# Altium PCB OvenPi.PcbDoc
Units mil, origin at the board's own origin, x right, y up, seen from the top; angles counter-clockwise.
Board outline 1525 x 1500 mil, 2 copper layers (Top Layer, Bottom Layer); 12 components, 15 nets, 60 pads, 0 vias.
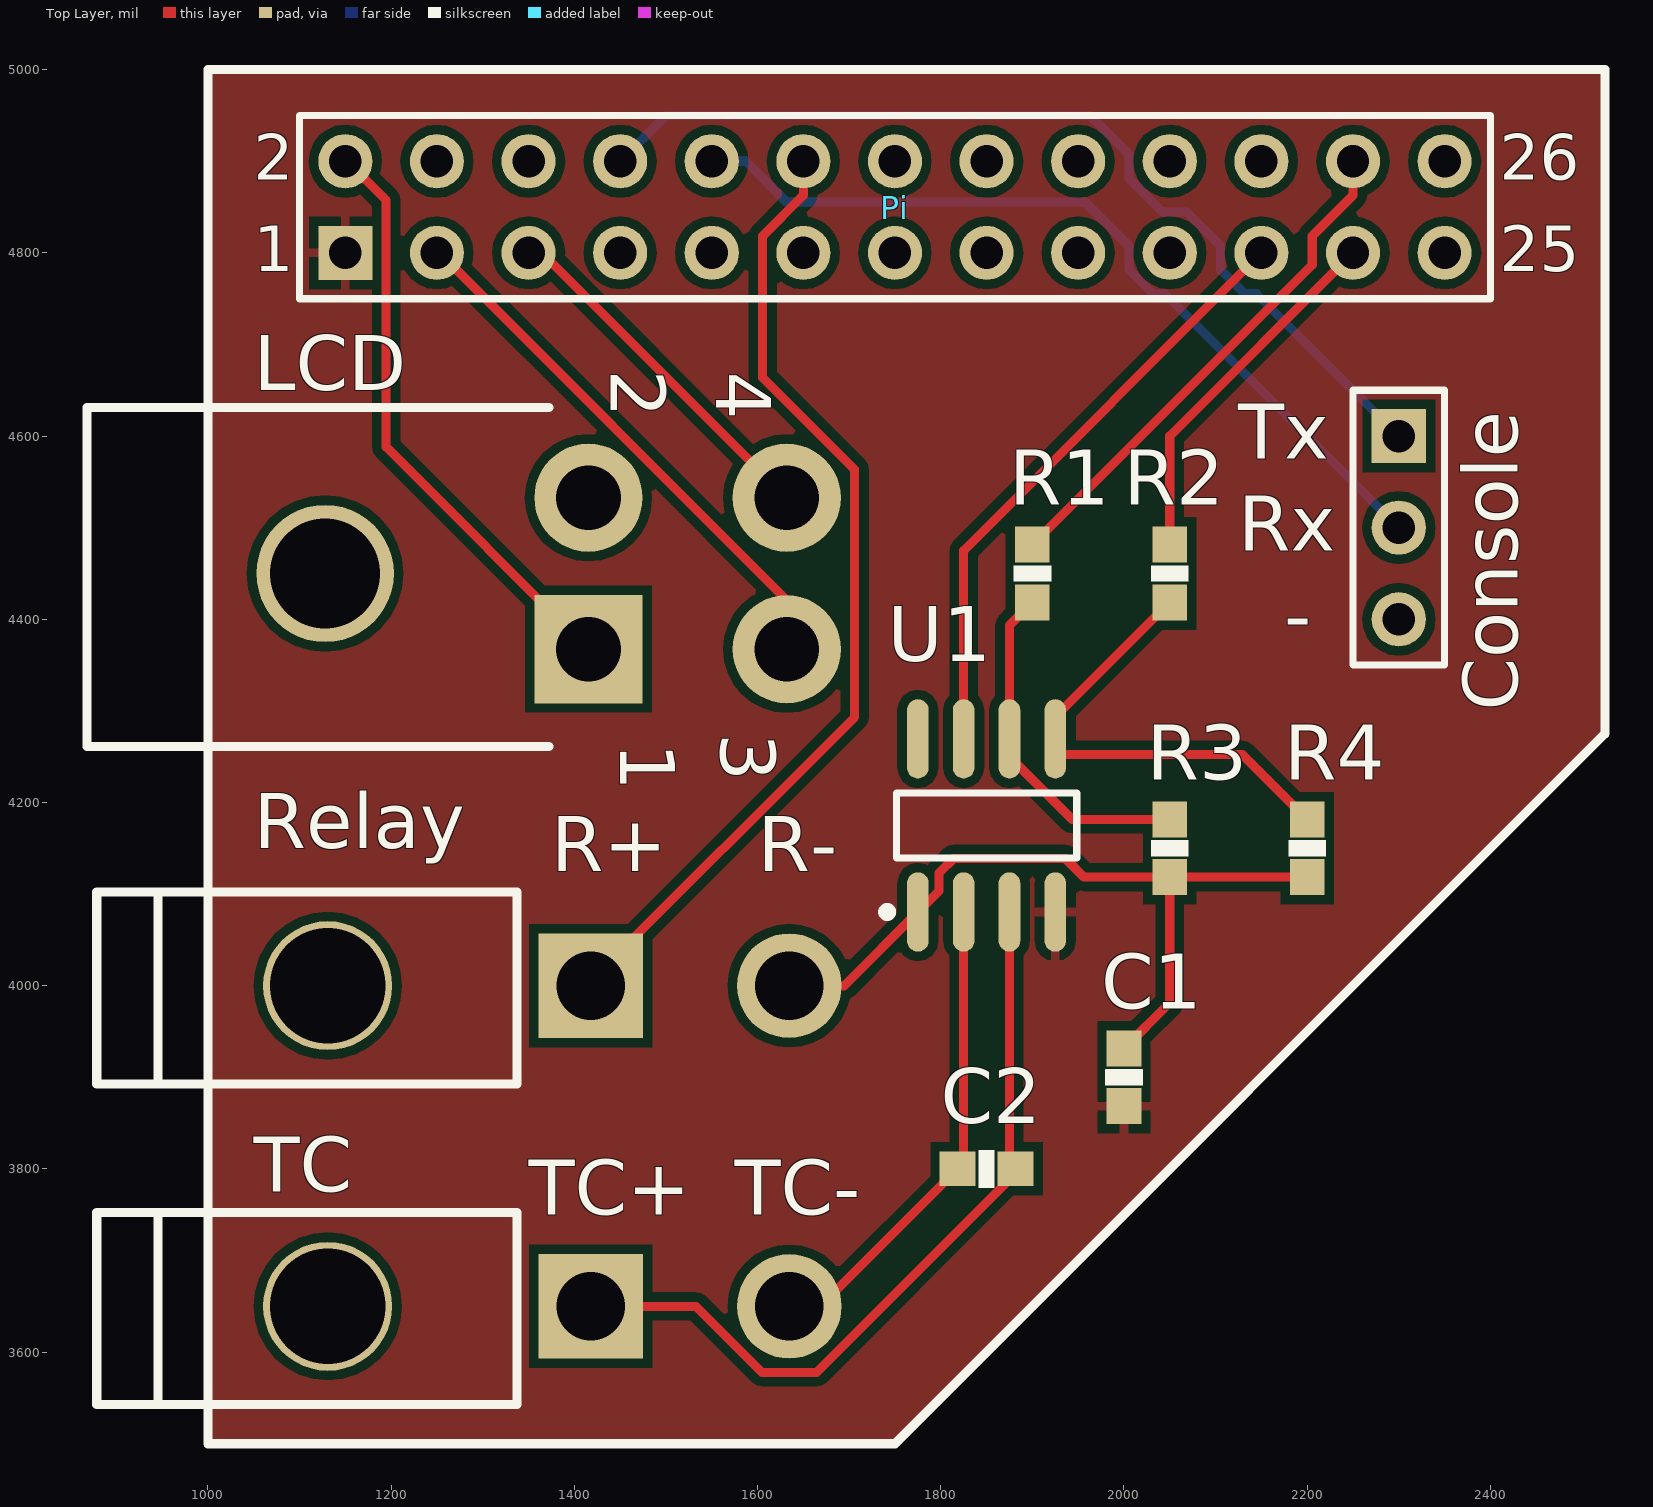
[diagram p0: Top Layer view]
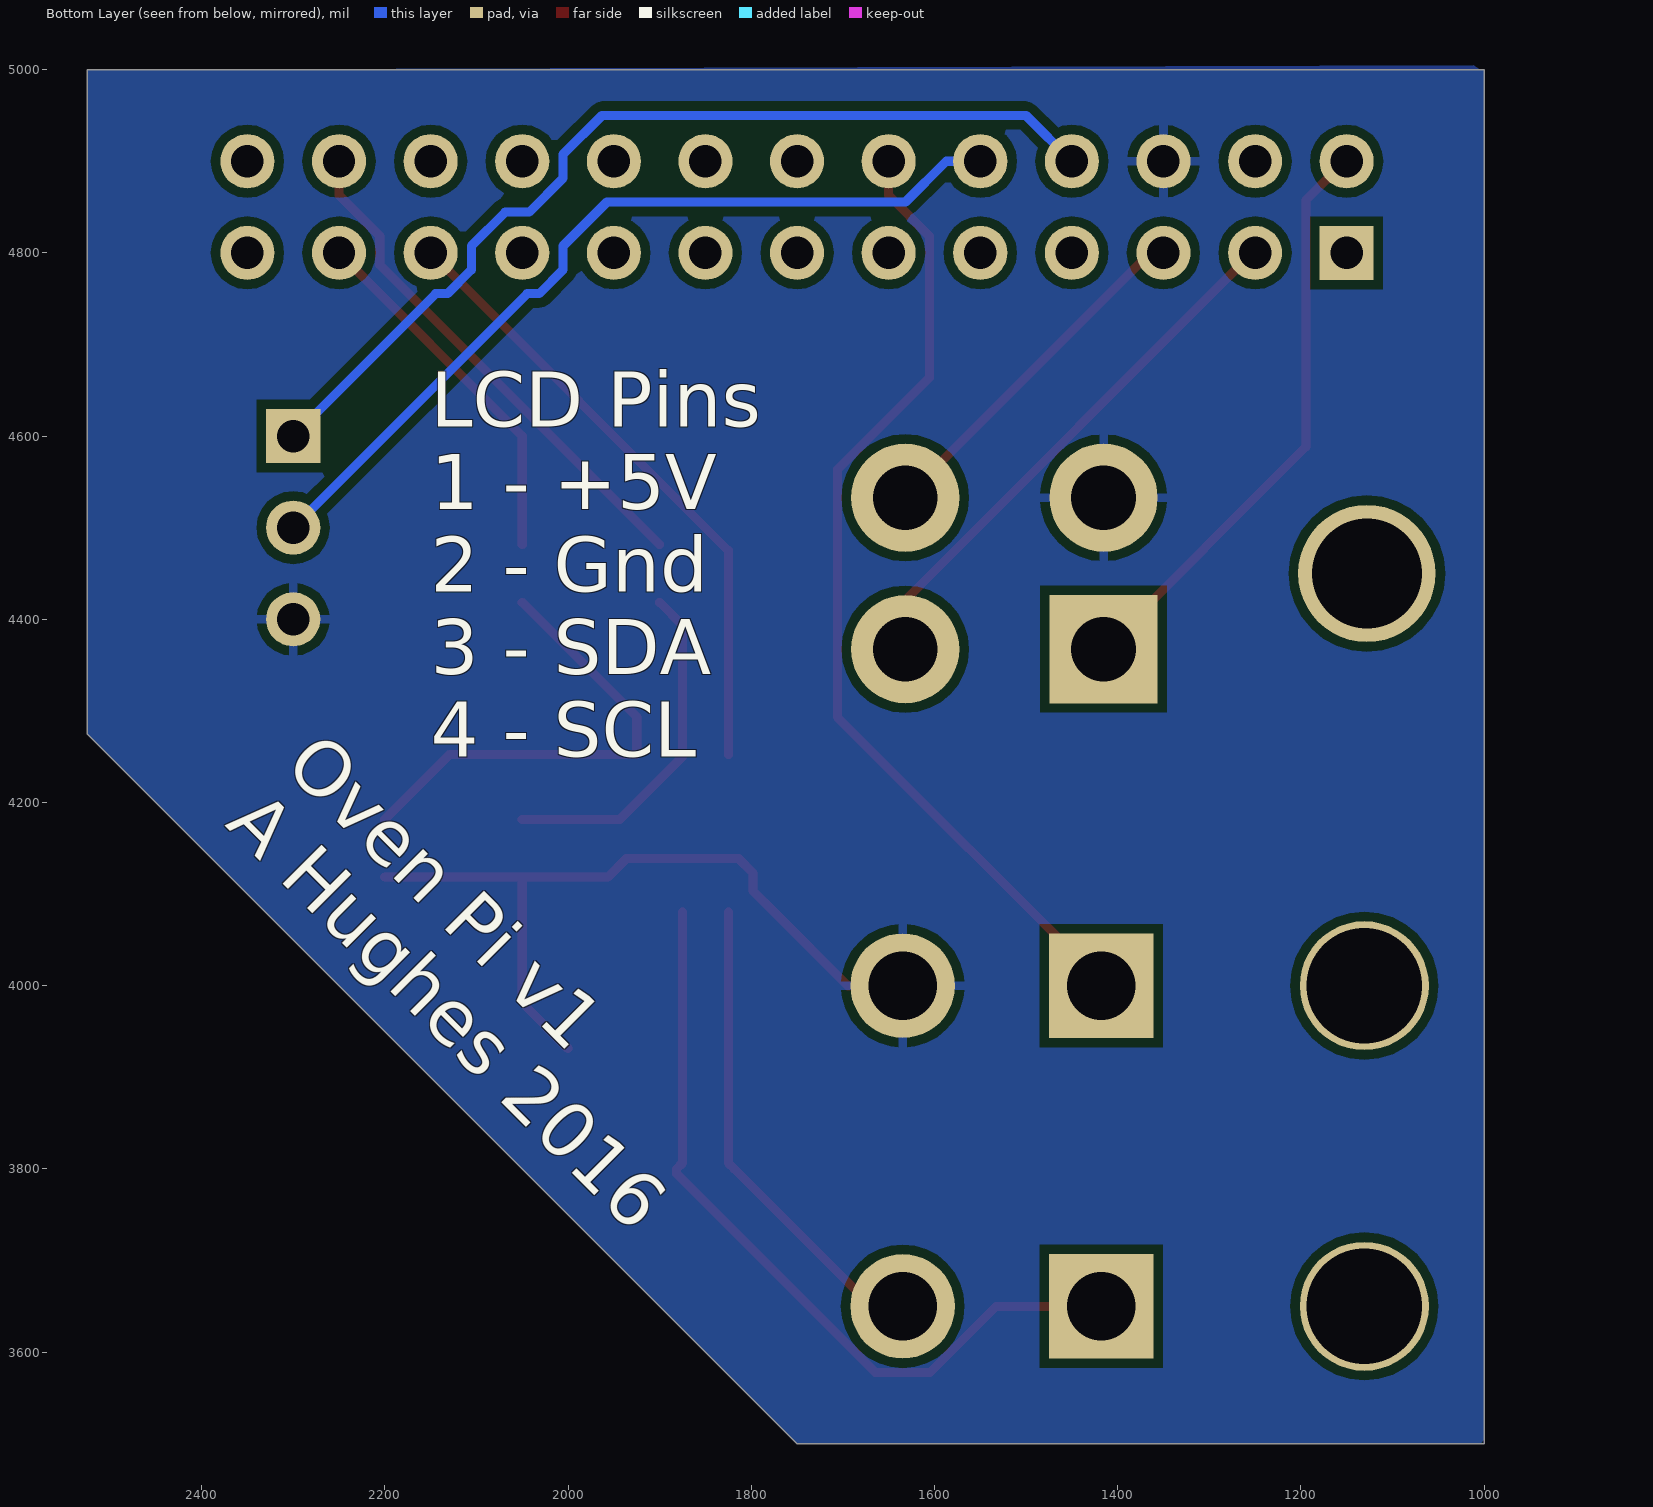
[diagram p1: Bottom Layer view, seen from below]
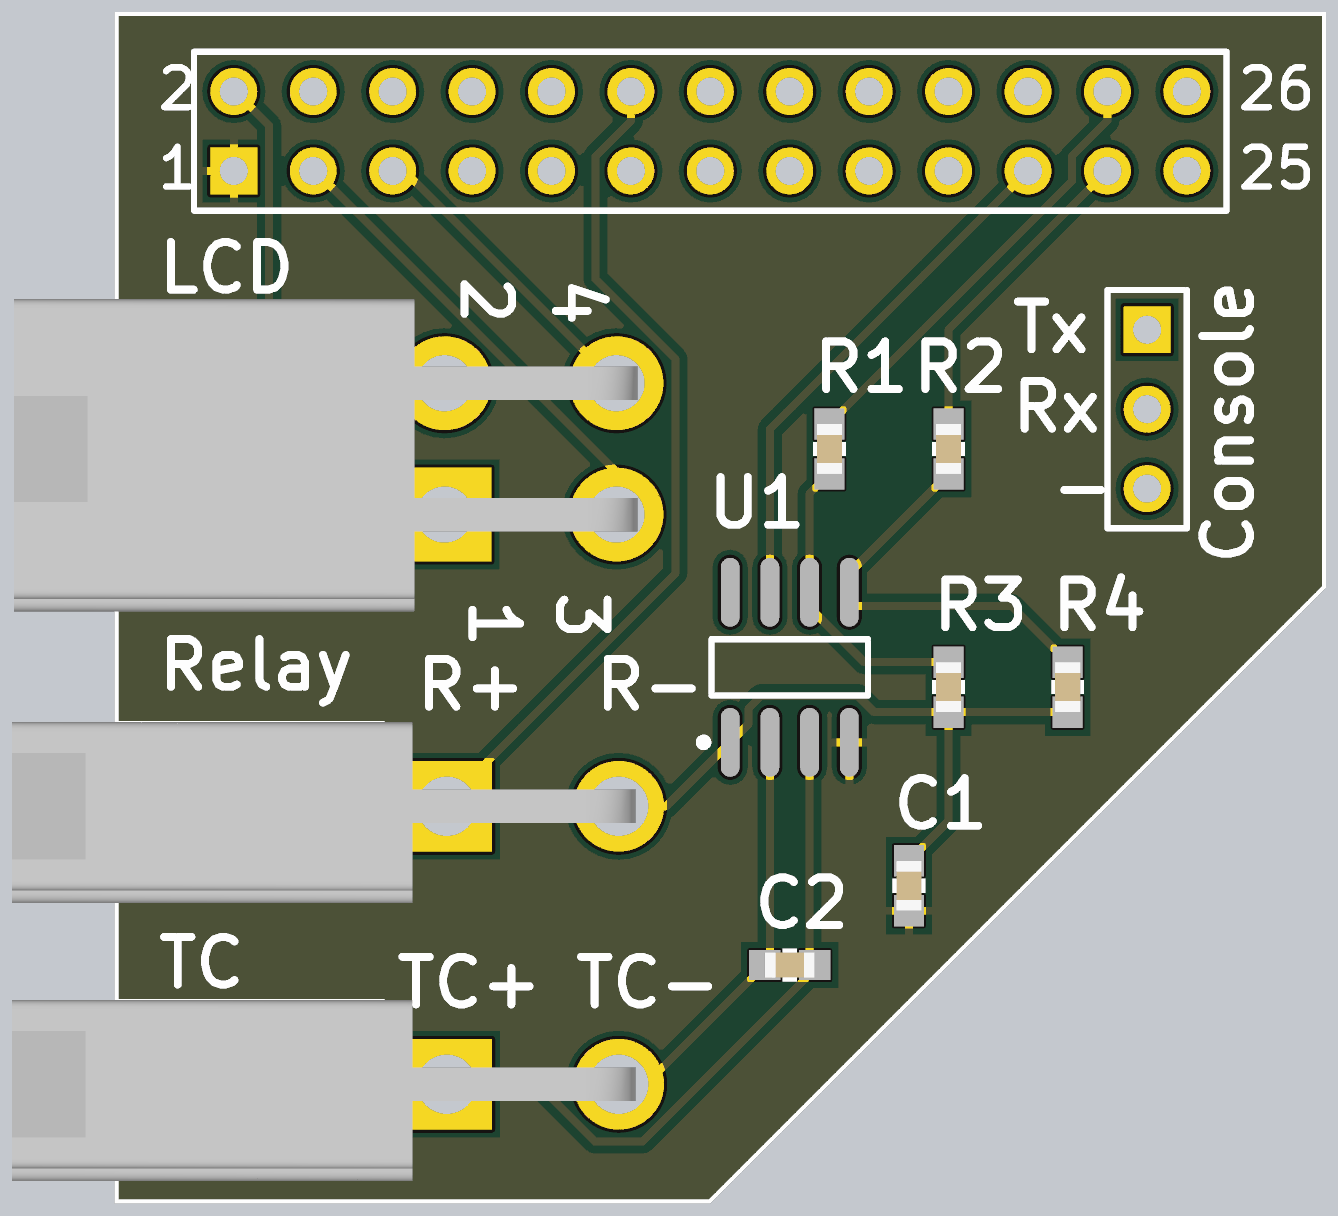
[diagram p2: 3D render of the assembled board from above, using the file's embedded part models]

## Layer stack, top to bottom
Top Solder: solder mask 0.4, Solder Resist, Dk 3.5
Top Layer: signal copper 1.4
Dielectric 1: dielectric 12.6, FR-4, Dk 4.8
Bottom Layer: signal copper 1.4
Bottom Solder: solder mask 0.4, Solder Resist, Dk 3.5

## Board outline
1000,3500 1750,3500 2525,4275 2525,5000 1000,5000

## Design rules (kind name [scope] priority, off if disabled: settings)
Clearance [All] p1: gap=10
PolygonConnect [All] p1: connectstyle=Relief reliefconductorwidth=10 reliefentries=4 polygonreliefangle="90 Angle" airgapwidth=10
RoutingVias [All] p1: holewidth=28 width=50 viastyle="Through Hole" minholewidth=28 minwidth=50 maxholewidth=28 maxwidth=50
SolderMaskExpansion [All] p1: expansion=4
Width [All] p1: maxlimit=10 minlimit=10 preferedwidth=10
30 further rules are at their usual default settings.

## Components (designator, comment, footprint, x,y, rotation, side; value= is the part's Value field where it differs from the comment)
C1 "GRM188F51E105ZA12D" 0603_B 2000,3900 r270 top
C2 "GRM188F51E105ZA12D" 0603_B 1850,3800 r0 top
Console "Header 3" HDR1X3 2300,4600 r270 top
LCD "Molex Mini-Fit Jr. 4-Pin no flange" "Molex Mini-Fit Jr. 4-Pin - no flange" 1250,4450 r270 top
Pi "Header 13X2" HDR2X13 1150,4800 r0 top
R1 "CRCW06032K40JNEA" 0603_B 1900,4450 r90 top
R2 "CRCW06032K40JNEA" 0603_B 2050,4450 r90 top
R3 "CRCW06032K40JNEA" 0603_B 2050,4150 r270 top
R4 "CRCW06032K40JNEA" 0603_B 2200,4150 r270 top
Relay "Mini-Fit Jr. 2-pin" "Mini-Fit Jr. 2" 1300,4000 r270 top
TC "Mini-Fit Jr. 2-pin" "Mini-Fit Jr. 2" 1300,3650 r270 top
U1 "MAX31855KASA+" MAXM-S8+4_N 1850,4175 r90 top

## Footprints (in the part's own frame and the unit in brackets; to place one, negate y for a bottom-side part, rotate by r counter-clockwise, add the part's x,y. Pads: shape width x height; smd on the part's side, far side on the other; paste and mask are expansions set on the pad)
0603_B [mm] "0603 Style B SMT capacitor"
  rect 1x0.96 smd mask+0.064: 1(-0.8,0) 2(0.8,0)
  silkscreen extent -0.23,-0.53 0.22,0.53, body extent -0.8,-0.4 0.8,0.41, height 0.8
HDR1X3 [mm] "Connector; Header; 3 Position"
  rect 1.5x1.5 hole 0.9: 1(0,0)
  round 1.5 hole 0.9: 2(2.54,0) 3(5.08,0)
  silkscreen extent -1.27,-1.27 6.35,1.27
HDR2X13 [mm] "Connector; Header; 13x2 Position"
  rect 1.5x1.5 hole 0.9: 1(0,0)
  round 1.5 hole 0.9: 2(0,2.54) 3(2.54,0) 4(2.54,2.54) 5(5.08,0) 6(5.08,2.54) 7(7.62,0) 8(7.62,2.54) 9(10.16,0) 10(10.16,2.54) 11(12.7,0) 12(12.7,2.54) 13(15.24,0) 14(15.24,2.54) 15(17.78,0) 16(17.78,2.54) 17(20.32,0) 18(20.32,2.54) 19(22.86,0) 20(22.86,2.54) 21(25.4,0) 22(25.4,2.54) 23(27.94,0) 24(27.94,2.54) 25(30.48,0) 26(30.48,2.54)
  silkscreen extent -1.27,-1.27 31.75,3.81
MAXM-S8+4_N [mm] "SOIC, 8-Leads, Body 4.9x3.9mm, Pitch 1.27mm, IPC Medium Density"
  oval 2.2x0.6 smd: 1(-2.4,1.905) 2(-2.4,0.635) 3(-2.4,-0.635) 4(-2.4,-1.905) 5(2.4,-1.905) 6(2.4,-0.635) 7(2.4,0.635) 8(2.4,1.905)
  silkscreen extent -2.52,-2.5 0.9,2.88, body extent -2,-2.5 2,2.5, height 1.75
"Mini-Fit Jr. 2" [mm]
  rect 2.9x2.9 hole 1.9: 1(0,3)
  round 2.9 hole 1.9: 2(0,8.5)
  round 3.578 hole 3.2: 3(0,-4.3)
  silkscreen extent -2.6,-10.7 2.73,0.95, body extent -2.7,-10.9 3.1,9.03, height 11.4
"Molex Mini-Fit Jr. 4-Pin - no flange" [mm] "4-Pin Moles Mini-Fit Jr. Right Angle Header"
  round 3.81 hole 3.048: 0(0,-3.099)
  rect 3x3 hole 1.8: 1(2.1,4.2)
  round 3 hole 1.8: 2(-2.1,4.2) 3(2.1,9.7) 4(-2.1,9.7)
  silkscreen extent -4.6,-9.7 4.8,3.1, body extent -4.8,-9.57 5.2,10.37, height 11.4

## Part data
C1 C2: "1uF Ceramic SMT 0603"
Console: "Header, 3-Pin"
LCD: library part "Molex Mini-Fit Jr. 4-Pin", "4-Pin Molex Mini-Fit Jr. Header"
Pi: "Header, 13-Pin, Dual row"
R1 R2 R3 R4: "0603 2.4kOhm resistor"
Relay TC: "Mini-Fit Jr. 2-pin Right Angle"
U1: "Cold Junction Compensated Thermocouple to Digital Converter, 14 Bits Temperature Resolution, -40 to 125 degC, 8-Pin SOIC (S8+4), Pb-Free"

## Nets (pads, with @x,y where several pads share a name; then routed paths per layer and width w, separated by ;. In a path a pad name is that pad's centre, name@x,y a point inside that pad or via, vN(x,y) a via of type N, cw(c..) or ccw(c..) an arc to the next point about the centre after c; other vN are vias at no path point)
CE0: Pi.24 R1.2 | length 563.5
  Top Layer w10: R1.2 2205.47,4786.97 2205.47,4818.44 2250,4862.97 Pi.24
CS: R1.1 R3.1 U1.6 | length 382.2
  Top Layer w10: R1.1 1875,4393.5 U1.6 1875,4250.08 1943.58,4181.5 R3.1
GND: C1.1 Console.3 LCD.2 Pi.6 R3.2 R4.2 Relay.2 U1.1 | length 850.4
  Top Layer w10: Relay.2 1694.49,4000 U1.1 1798.19,4103.7 1798.19,4123.11 1813.89,4138.82 1936.11,4138.82 1956.42,4118.5 R3.2 ; C1.1 2050,3981.5 R3.2 ; R4.2 R3.2
MISO: Pi.21 U1.7 | length 682.3
  Top Layer w10: U1.7@1825,4252.36 1825,4475 Pi.21
NetPi_12: Pi.12 Relay.1 | length 1079.3
  Top Layer w10: Relay.1 1418.11,4005.43 1705.94,4293.27 1705.94,4563.35 1605.47,4663.82 1605.47,4818.44 1650,4862.97 Pi.12
NetR2_1: R2.1 R4.1 U1.5 | length 522.3
  Top Layer w10: R2.1 1925,4293.5 1925,4252.36 2129.13,4252.36 R4.1
RXD: Console.2 Pi.10 | length 930.9
  Bottom Layer w10: Pi.10 1587.03,4900 1631.56,4855.47 1957.5,4855.47 2005.47,4807.5 2005.47,4781.56 2031.56,4755.47 2044.53,4755.47 Console.2
SCL: LCD.4 Pi.5 | length 392.6
  Top Layer w10: Pi.5 1364.57,4800 LCD.4
SCLK: Pi.23 R2.2 | length 401.3
  Top Layer w10: R2.2 2050,4600 Pi.23
SDA: LCD.3 Pi.3 | length 592.5
  Top Layer w10: Pi.3 1252.76,4800 1631.89,4420.87 LCD.3
TC+: C2.2 TC.1 U1.3 | length 871.4
  Top Layer w10: TC.1 1532.7,3650 1604.79,3577.91 1664.5,3577.91 1881.5,3794.9 C2.2 1875,3806.5 U1.3
TC-: C2.1 TC.2 U1.2 | length 529.2
  Top Layer w10: TC.2 1668.5,3650 C2.1 1825,3806.5 U1.2
TXD: Console.1 Pi.8 | length 1046.1
  Bottom Layer w10: Pi.8 1500,4950 1962.97,4950 2005.47,4907.5 2005.47,4881.56 2042.5,4844.53 2068.44,4844.53 2105.47,4807.5 2105.47,4781.56 2131.56,4755.47 2144.53,4755.47 Console.1
VCC3: C1.2 Pi.1 U1.4
VCC5: LCD.1 Pi.2 | length 643.7
  Top Layer w10: Pi.2 1151.9,4900 1194.53,4857.37 1194.53,4588.15 LCD.1
pads on no net: LCD.0 Pi.4 Pi.7 Pi.9 Pi.11 Pi.13 Pi.14 Pi.15 Pi.16 Pi.17 Pi.18 Pi.19 Pi.20 Pi.22 Pi.25 Pi.26 Relay.3 TC.3 U1.8

## Polygon pours and split planes (outlines as drawn)
VCC3 on Top Layer "3+" (solid, remove dead copper, pour order 0): 995,5000 1000,4995 1000,3500 1750,3500 2525,4275 2525,5000 1005,5005 1000,5000
GND on Bottom Layer "Gnd" (solid, remove dead copper, pour order 2): 995,5005 1000,5000 1000,3500 1750,3500 2525,4275 2525,5000

## Silkscreen, mask and mechanical layers (free items; w line width, h text height)
Top Overlay:
  the board outline again, w10
  text "Tx" at 2125,4575 h60
  text "Rx" at 2125,4475 h60
  text "-" at 2175,4375 h60
  text "R+" at 1375,4125 h60
  text "R-" at 1600,4125 h60
  text "TC+" at 1350,3750 h60
  text "TC-" at 1575,3750 h60
Bottom Overlay:
  text "LCD Pins / 1 - +5V / 2 - Gnd / 3 - SDA / 4 - SCL" at 2150,4250 h60
  text "Oven Pi v1 / A Hughes 2016" at 2375,4175 h60 r45

## Dimensions
1000,5000 to 2525,5000 on Keep-Out Layer
1000,5000 to 1000,3500 on Keep-Out Layer

## Text inside footprints (layer, text, board x,y; h text height)
LCD: Top Overlay "1" at 1450,4265.35 h60 r270; Top Overlay "4" at 1555,4670.39 h60 r270; Top Overlay "3" at 1560,4275.35 h60 r270; Top Overlay "2" at 1440,4672.52 h60 r270
Pi: Top Overlay "26" at 2410,4880 h50; Top Overlay "25" at 2410,4780 h50; Top Overlay "1" at 1050,4780 h50; Top Overlay "2" at 1050,4880 h50